# Altium PCB completed.PcbDoc
Units mil, origin at the board's own origin, x right, y up, seen from the top; angles counter-clockwise.
Board outline 6000 x 4000 mil, 2 copper layers (Top Layer, Bottom Layer); 23 components, 15 nets, 71 pads, 0 vias.
Unrouted connection lines stored in the file: 1.
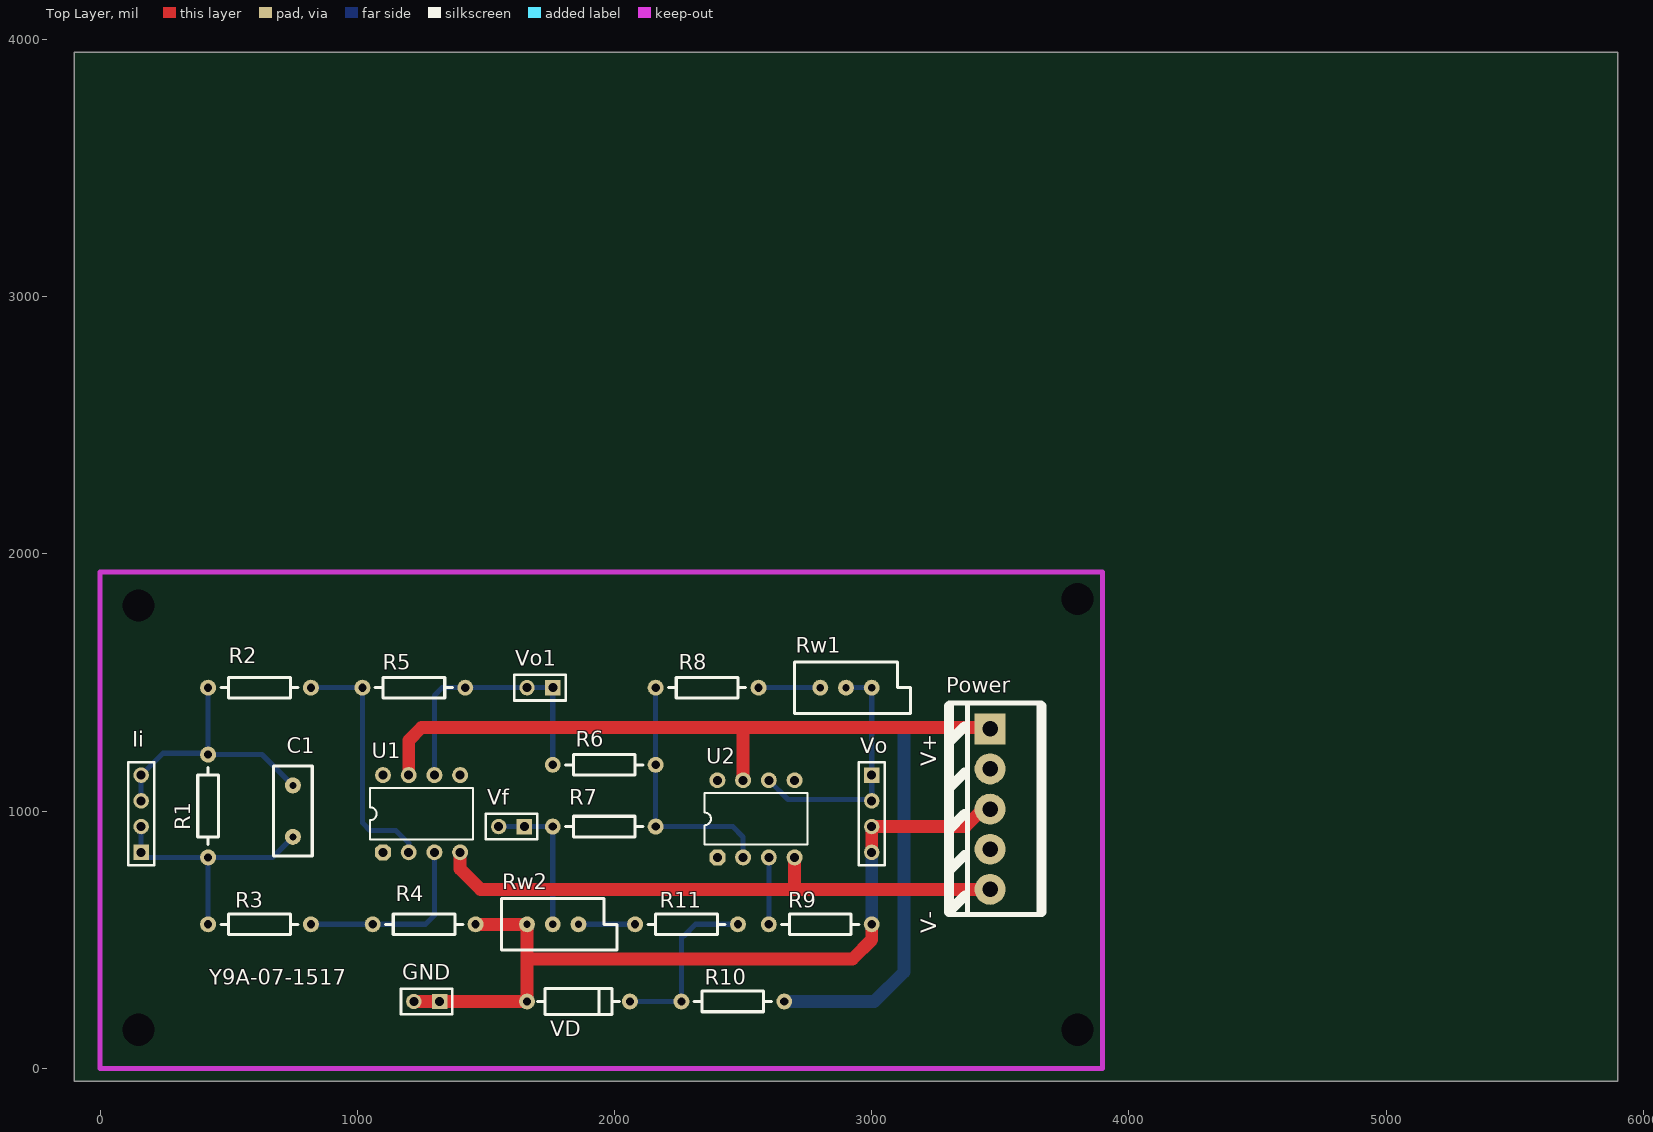
[diagram p0: Top Layer view]
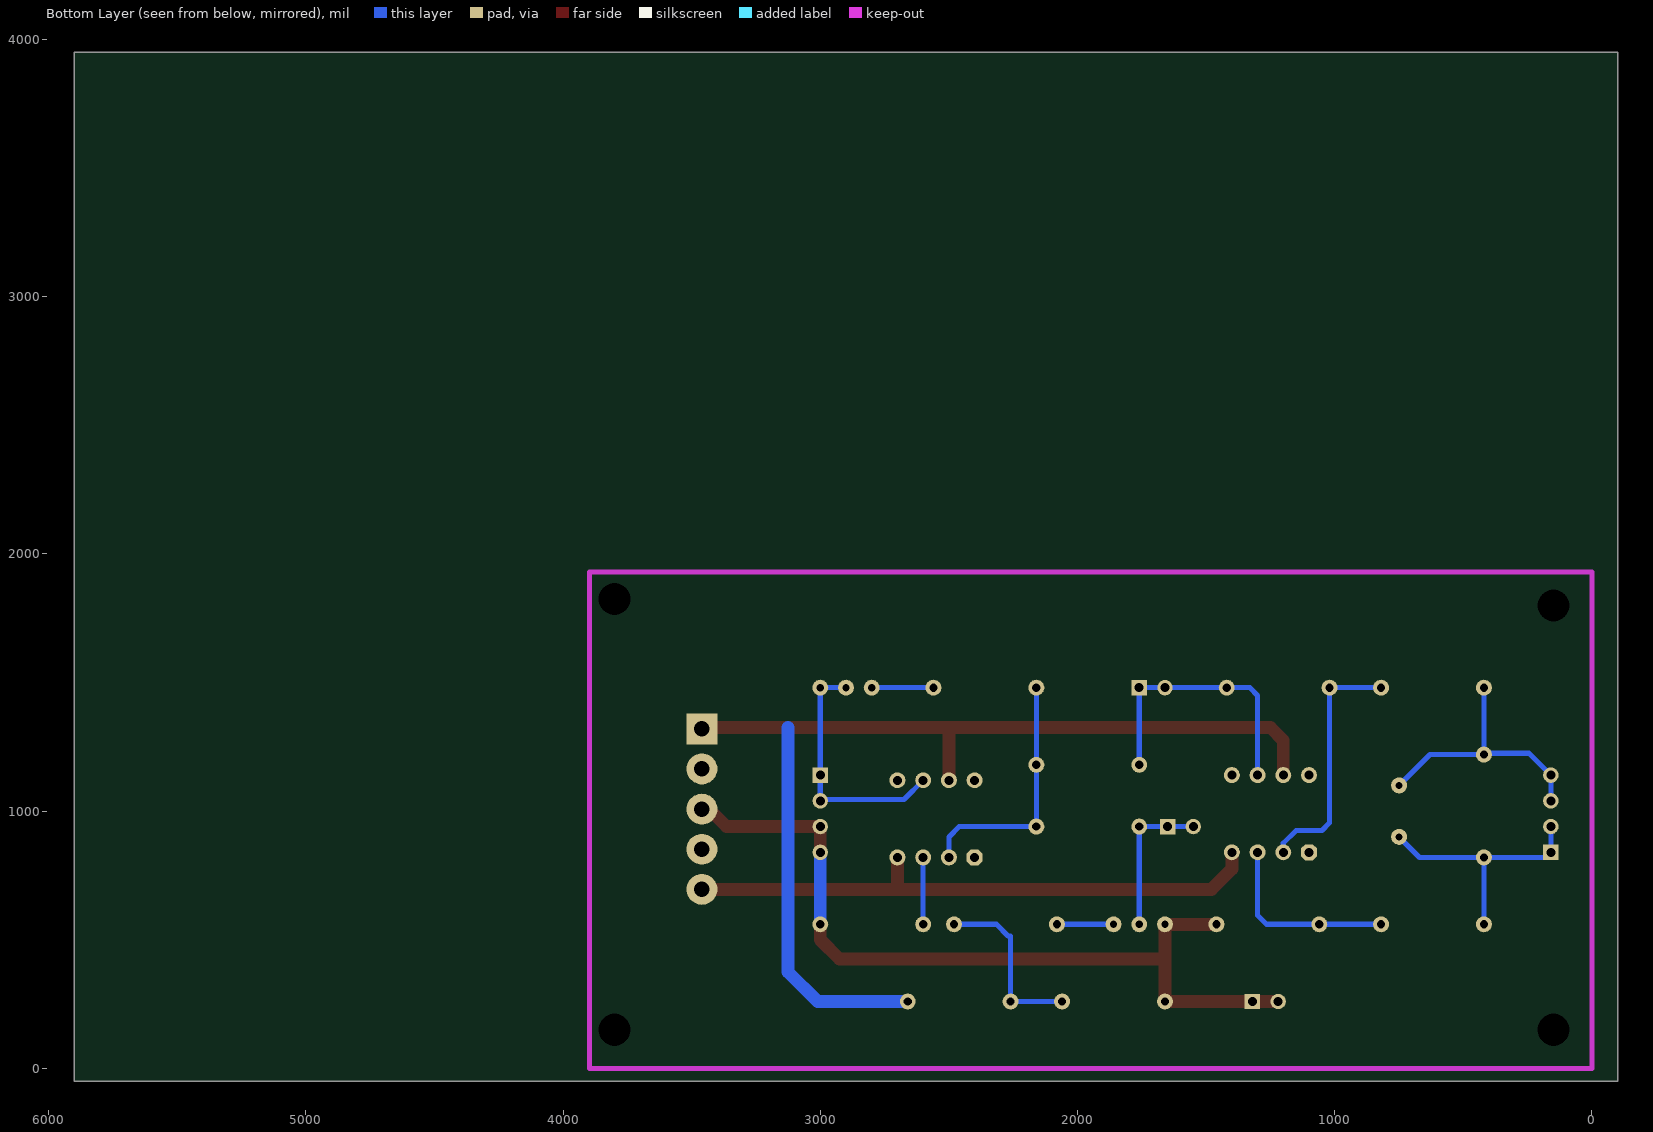
[diagram p1: Bottom Layer view, seen from below]

## Layer stack, top to bottom
Top Layer: signal copper 1.4
Dielectric: dielectric 12.6, FR-4, Dk 4.8
Bottom Layer: signal copper 1.4

## Board outline
-100,-50 5900,-50 5900,3950 -100,3950

## Design rules (kind name [scope] priority, off if disabled: settings)
Clearance [All] p1 off: gap=10
DiffPairsRouting [All] p1 off: maxlimit=10 minlimit=10 mostfreqgap=10 maxuncoupledlength=500
FanoutControl Fanout_BGA [IsBGA] p1 off: bgadir=Out bgaviamode=Centered fanoutstyle=Auto fanoutdirection=Alternating viagrid=1 // Fanout_BGA (Default Rule)
FanoutControl Fanout_LCC [IsLCC] p2 off: bgadir=Out bgaviamode=Centered fanoutstyle=Auto fanoutdirection=Alternating viagrid=1 // Fanout_LCC (Default Rule)
FanoutControl Fanout_SOIC [IsSOIC] p3 off: bgadir=Out bgaviamode=Centered fanoutstyle=Auto fanoutdirection=Alternating viagrid=1 // Fanout_SOIC (Default Rule)
FanoutControl Fanout_Small [(CompPinCount < 5)] p4 off: bgadir=Out bgaviamode=Centered fanoutstyle=Auto fanoutdirection=OutThenIn viagrid=1 // Fanout_Small (Default Rule)
FanoutControl Fanout_Default [All] p5 off: bgadir=Out bgaviamode=Centered fanoutstyle=Auto fanoutdirection=Alternating viagrid=1 // Fanout_Default (Default Rule)
HoleSize [All] p1 off: absolutevalues=TRUE maxlimit=100 minlimit=1 maxpercent=80.000 minpercent=20.000
HoleToHoleClearance [All] p1 off: gap=10 allowstackedmicrovias=TRUE
LayerPairs [All] p1 off: enforce=TRUE
MinimumSolderMaskSliver [All] p1 off: minsoldermaskwidth=10
NetAntennae [All] p1 off: netantennaetolerance=0
PolygonConnect [All] p1: connectstyle=Relief reliefconductorwidth=10 reliefentries=4 polygonreliefangle="90 Angle"
RoutingCorners [All] p1 off: cornerstyle=45-Degree minsetback=100 maxsetback=100
RoutingLayers [All] p1 off: top layer_v5=TRUE bottom layer_v5=TRUE
RoutingPriority [All] p1 off: routingpriority=0
RoutingTopology [All] p1 off: topology=Shortest
RoutingVias [All] p1 off: holewidth=28 width=50 viastyle="Through Hole" minholewidth=28 minwidth=50 maxholewidth=28 maxwidth=50
ShortCircuit [All] p1 off: allowed=FALSE
SilkToSilkClearance [All] p1 off: silktosilkclearance=10
SilkscreenOverComponentPads [All] p1 off: minsilkscreentomaskgap=10
SolderMaskExpansion [All] p1: expansion=4
TestPointUsage [All] p1 off: valid=0 allowmultiple=FALSE
Testpoint [All] p1 off: side=15 testpointundercomponent=TRUE minsize=40 maxsize=100 preferedsize=60 minholesize=0 maxholesize=40 preferedholesize=32 testpointgrid=1 style=1023 order=0-112345678
UnRoutedNet [All] p1 off:
Width [All] p1: maxlimit=50 minlimit=10 preferedwidth=10 toplayer_prefwidth=50 bottomlayer_prefwidth=20 minimp=50.000000 maximp=50.000000 favimp=50.000000
5 further rules are at their usual default settings.

## Components (designator, comment, footprint, x,y, rotation, side; value= is the part's Value field where it differs from the comment)
C1 "CAP" RAD-0.2 750,1100 r270 top
GND "Header 2" SIP-2 1320,260 r180 top
Ii "Header 4" SIP-4 160,840 r90 top
Power "Header 5" "POWER PLUG5" 3460,1320 r90 top
R1 "RES2" AXIAL0.4 420,820 r90 top
R2 "RES2" AXIAL0.4 420,1480 r0 top
R3 "RES2" AXIAL0.4 420,560 r0 top
R4 "RES2" AXIAL0.4 1460,560 r180 top
R5 "RES2" AXIAL0.4 1020,1480 r0 top
R6 "RES2" AXIAL0.4 1760,1180 r0 top
R7 "RES2" AXIAL0.4 1760,940 r0 top
R8 "RES2" AXIAL0.4 2160,1480 r0 top
R9 "RES2" AXIAL0.4 3000,560 r180 top
R10 "RES2" AXIAL0.4 2660,260 r180 top
R11 "RES2" AXIAL0.4 2480,560 r180 top
Rw1 "POT1" VR-5 2800,1480 r0 top
Rw2 "POT1" VR-5 1660,560 r0 top
U1 "OP-07" DIP-8 1100,840 r90 top
U2 "OP-07" DIP-8 2400,820 r90 top
VD "ZENER2" DIODE-0.4 1660,260 r0 top
Vf "Header 2" SIP-2 1650,940 r180 top
Vo "Header 4" SIP-4 3000,1140 r270 top
Vo1 "Header 2" SIP-2 1760,1480 r180 top

## Footprints (in the part's own frame and the unit in brackets; to place one, negate y for a bottom-side part, rotate by r counter-clockwise, add the part's x,y. Pads: shape width x height; smd on the part's side, far side on the other; paste and mask are expansions set on the pad)
AXIAL0.4 [mil]
  round 62 hole 32: 1(0,0) 2(400,0)
  silkscreen extent 50,-40 350,40
DIODE-0.4 [mil]
  round 62 hole 32: 1(0,0) 2(400,0)
  silkscreen extent 40,-50 360,50
DIP-8 [mil]
  oct 62x62 hole 35: 1(0,0)
  round 62 hole 35: 2(0,-100) 3(0,-200) 4(0,-300) 5(300,-300) 6(300,-200) 7(300,-100) 8(300,0)
  silkscreen extent 50,-350 250,50
"POWER PLUG5" [mil] "双电源插座"
  rect 120x120 hole 60: 1(0,0)
  round 120 hole 60: 2(-156,0) 3(-312,0) 4(-468,0) 5(-624,0)
  silkscreen extent -722,-200 100,160
RAD-0.2 [mil]
  round 62 hole 28: 1(0,0) 2(200,0)
  silkscreen extent -75,-75 275,75
SIP-2 [mil]
  rect 60x60 hole 35: 1(0,0)
  round 60 hole 35: 2(100,0)
  silkscreen extent -50,-50 150,50
SIP-4 [mil]
  rect 60x60 hole 35: 1(0,0)
  round 60 hole 35: 2(100,0) 3(200,0) 4(300,0)
  silkscreen extent -50,-50 350,50
VR-5 [mil]
  round 62 hole 28: 1(0,0) 2(200,0) 3(100,0)
  silkscreen extent -100,-100 350,100

## Part data
GND Vf Vo1: "Header, 2-Pin"
Ii Vo: "Header, 4-Pin"
Power: "Header, 5-Pin"
Rw1 Rw2: "Potentiometer"
VD: "Zener Diode"

## Free pads (board coordinates)
  round 60 hole 125: 1(150,1800) 2(150,150) 3(3800,150) 4(3800,1825)

## Nets (pads, with @x,y where several pads share a name; then routed paths per layer and width w, separated by ;. In a path a pad name is that pad's centre, name@x,y a point inside that pad or via, vN(x,y) a via of type N, cw(c..) or ccw(c..) an arc to the next point about the centre after c; other vN are vias at no path point)
+12V: Power.1 R10.1 U1.7 U2.7 | length 4085.4
  Top Layer w20: Power.1@3455,1325 Power.1
  Top Layer w50: U1.7 1200,1275 1250,1325 2500,1325 ; U2.7 2500,1325 ; Power.1@3455,1325 3150,1325 2500,1325
  Bottom Layer w50: R10.1 3010,260 3125,375 3125,1325
-12V: Power.5 U1.4 U2.4 | length 2281.7
  Top Layer w50: U1.4 1400,775 1479,696 2700,696 ; U2.4 2700,696 ; Power.5 2700,696
GND: GND.1 GND.2 Power.3 R4.1 R9.1 Rw2.1 VD.1 Vo.3 Vo.4 | length 3236.3
  Top Layer w20: Power.3@3443,1025 Power.3
  Top Layer w50: GND.2 GND.1 VD.1 1660,425 ; R4.1 Rw2.1 1660,425 ; R9.1 3000,500 2925,425 1660,425 ; Vo.4 Vo.3 3365,940 Power.3@3433,1008
  Bottom Layer w50: R9.1 Vo.4
NetC1_1: C1.1 Ii.3 Ii.4 R1.2 R2.1 | length 1088.2
  Top Layer w10: Ii.3 Ii.3@160,1060
  Bottom Layer w10: Ii.3@150,1050 160,1060 Ii.3
  Bottom Layer w20: Ii.3 Ii.4 245,1225 405,1225 R1.2@415,1215 ; R2.1 R1.2 630,1220 C1.1
NetC1_2: C1.2 Ii.1 Ii.2 R1.1 R3.1 | length 1003.1
  Bottom Layer w20: Ii.2 160,820 R1.1 ; R3.1 R1.1 ; C1.2 670,820 R1.1
NetR2_2: R2.2 R5.1 U1.2 | length 973.1
  Bottom Layer w20: R2.2 R5.1 1020,955 1050,925 1150,925 1200,875 U1.2
NetR3_2: R3.2 R4.2 U1.3 | length 739.5
  Bottom Layer w20: R3.2 R4.2 1265,560 1300,595 U1.3
NetR5_2: R5.2 R6.1 U1.6 Vo1.1 Vo1.2 | length 1082.4
  Bottom Layer w20: U1.6 1300,1450 1330,1480 R5.2 Vo1.2 Vo1.1 R6.1
NetR6_2: R6.2 R7.2 R8.1 U2.2 | length 976.6
  Bottom Layer w20: R8.1 R6.2 R7.2 2460,940 2500,900 U2.2
NetR7_1: R7.1 Rw2.3 Vf.1 Vf.2 | length 590
  Bottom Layer w20: Vf.2 Vf.1 R7.1 Rw2.3
NetR8_2: R8.2 Rw1.1 | length 240
  Bottom Layer w20: R8.2 Rw1.1
NetR9_2: R9.2 U2.3 | length 260
  Bottom Layer w20: R9.2 U2.3
NetR10_2: R10.2 R11.1 VD.2 | length 683.6
  Bottom Layer w20: VD.2 R10.2 2260,515 ; 2270,515 2315,560 R11.1
NetR11_2: R11.2 Rw2.2 | length 220
  Bottom Layer w20: Rw2.2 R11.2
NetRw1_2: Rw1.2 Rw1.3 U2.6 Vo.1 Vo.2 | length 983.1
  Bottom Layer w20: U2.6 2675,1045 2875,1045 ; 2895,1045 2875,1045 ; Rw1.3 Rw1.2 3000,1050 2995,1045 2875,1045
pads on no net: Power.2 Power.4 U1.1 U1.5 U1.8 U2.1 U2.5 U2.8

## Keep-outs
Keep-Out Layer:
  lines w20: 0,0 3897.64,0 3897.64,1929.13 0,1929.13 0,0

## Silkscreen, mask and mechanical layers (free items; w line width, h text height)
Top Overlay:
  text "V+" at 3250,1175 h60 r90
  text "V-" at 3250,525 h60 r90
  text "Y9A-07-1517" at 425,325 h60